# EAGLE board broken (EAGLE 8.6.0)
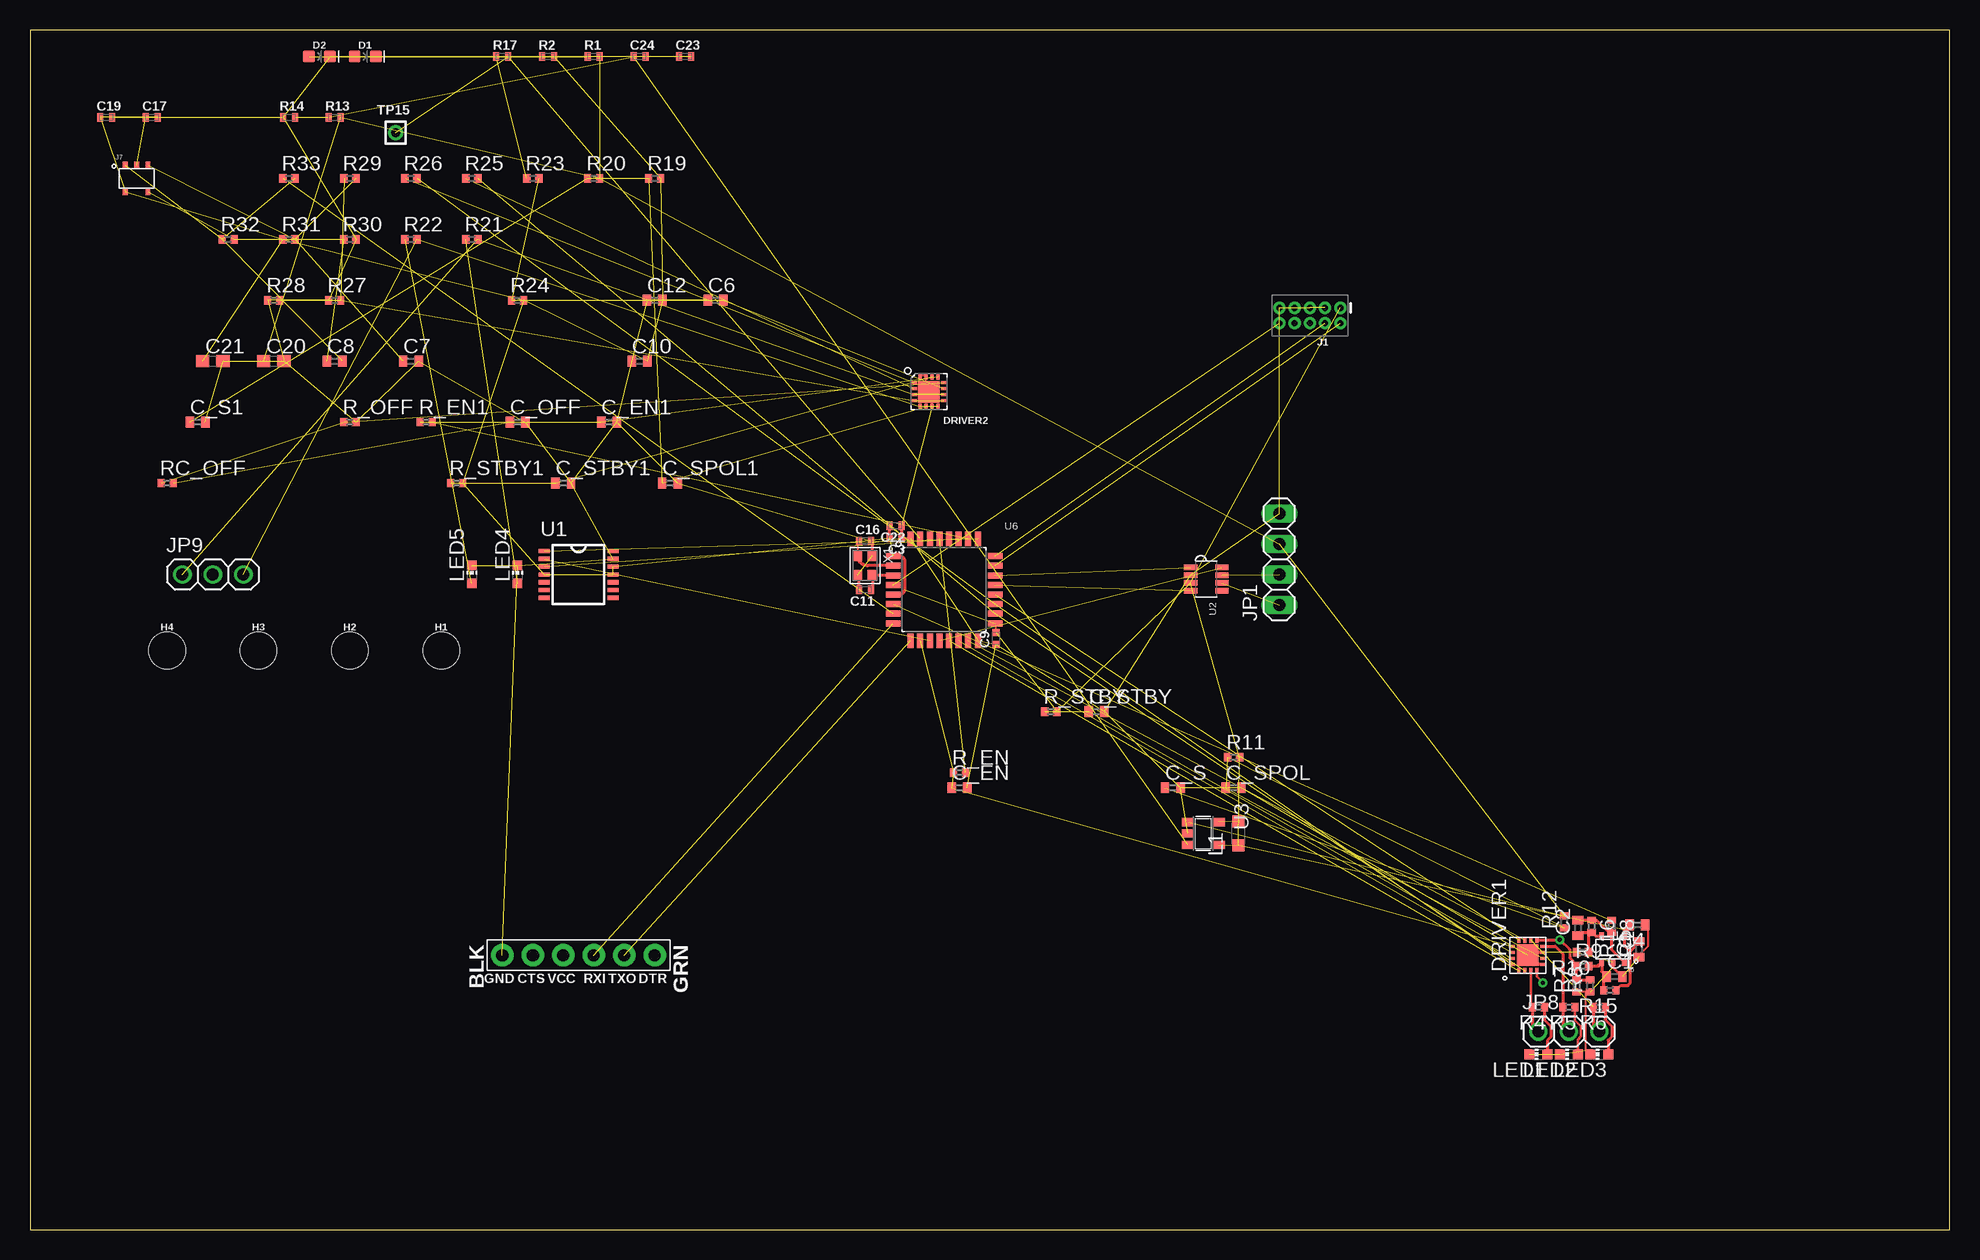
[diagram p0: board, top side]
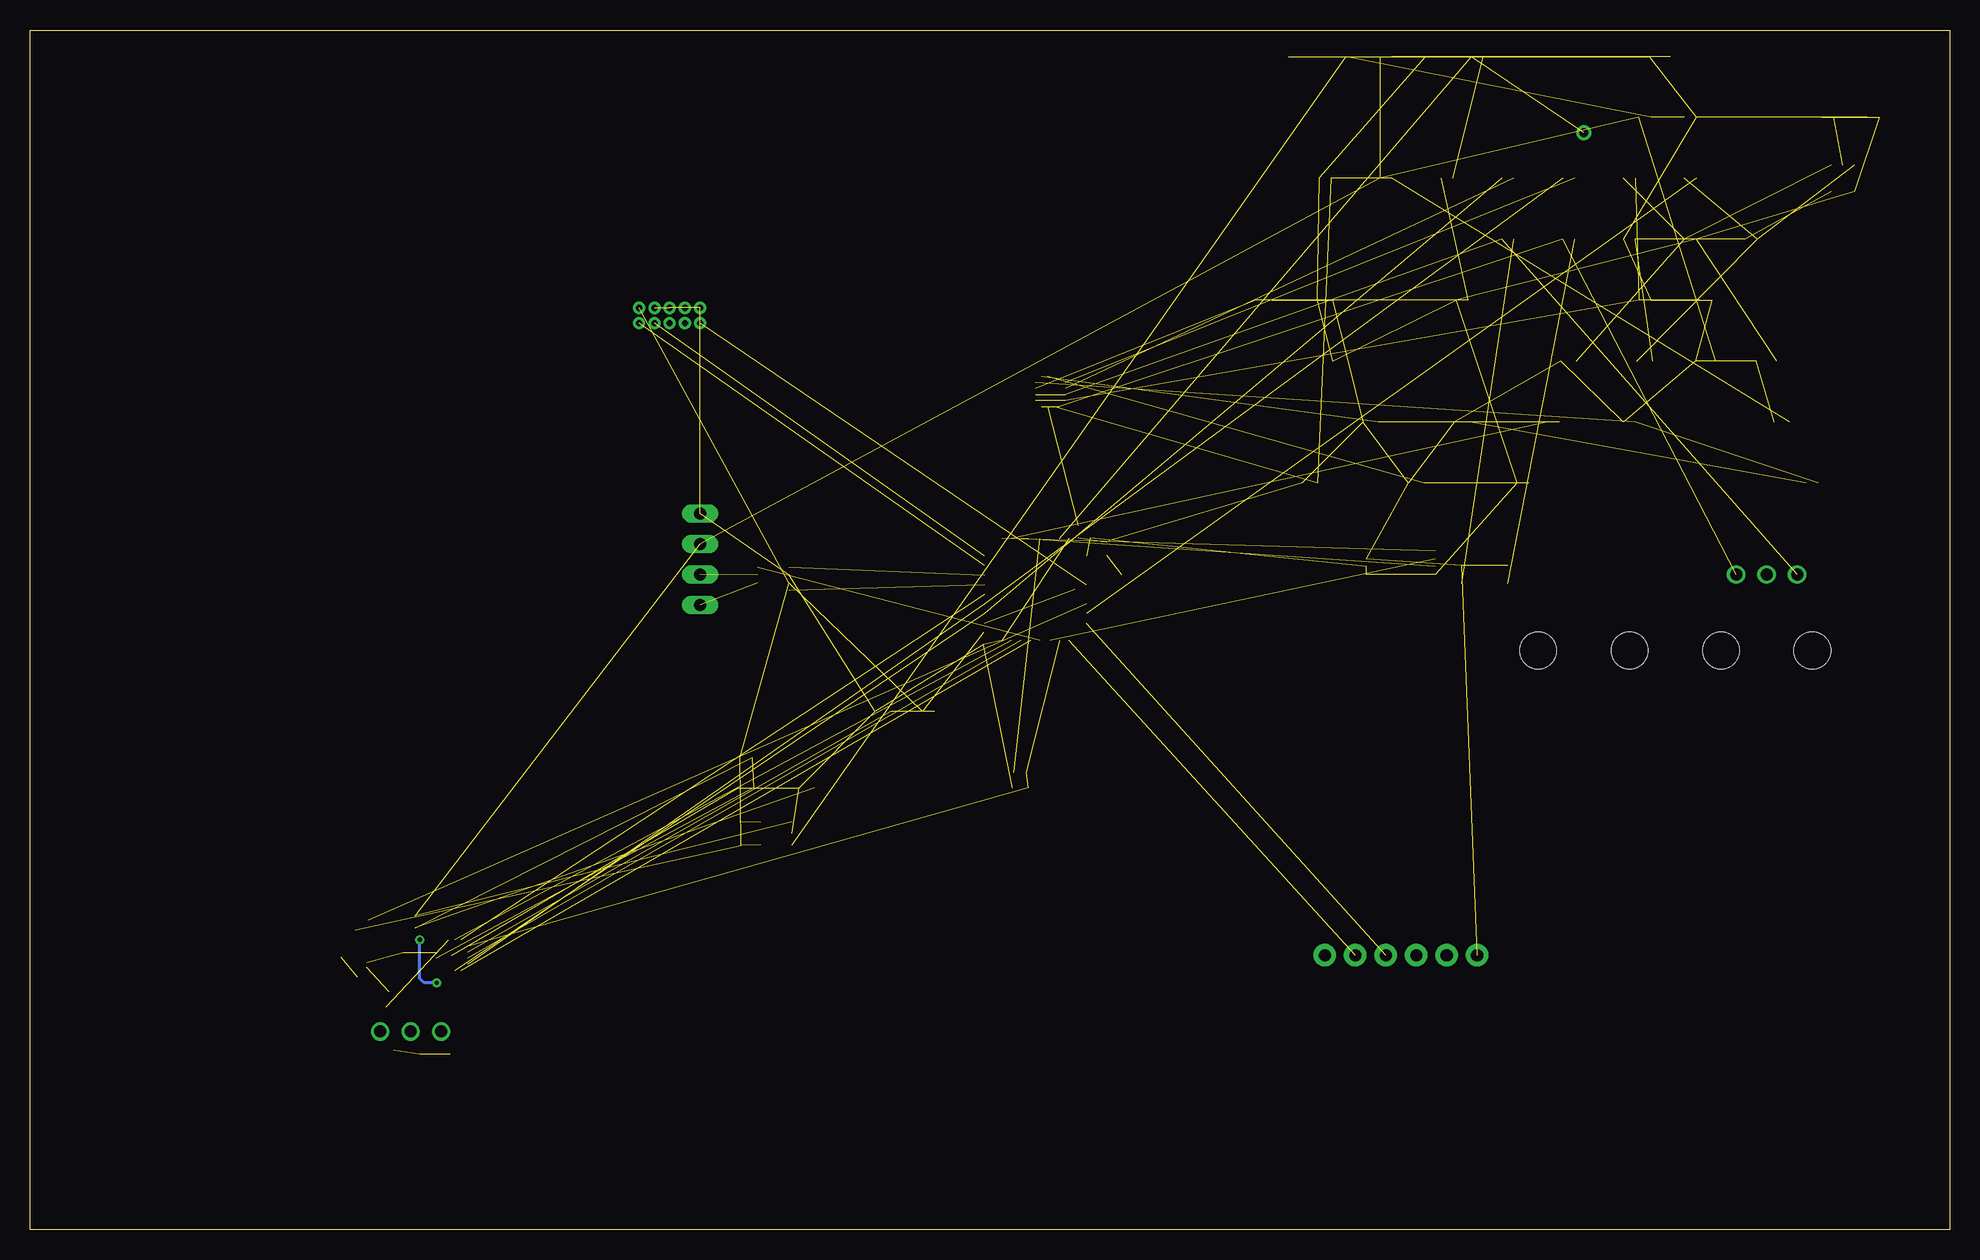
[diagram p1: board, bottom side, seen from below]

Size 160 x 100 mm. Coordinates in mm from the lower left corner, seen from the top.
Outline: 0,0 160,0 160,100 0,100 0,0
Copper layers (1*16): Top 0.035mm / dielectric 1.5mm / Bottom 0.035mm
Design rules "default": minimum track width 6mil, minimum drill 0.35mm, track to track 6mil, track to pad 6mil, pad to pad 6mil, via to via 6mil, smd to smd 6mil, copper to edge 40mil, drill to drill 6mil, minimum pad ring 10mil, minimum via ring 8mil, stop-mask expansion 4mil, vias tented up to drill 0mil, thermal gap 10mil

## Footprints (pad centres in the part's own frame; a part is rotated, then mirrored left to right if it is on the bottom)
C0402 = smd 0.7 x 0.9: 1 -0.65,0; 2 0.65,0
.0402-B-NOSILK = smd 0.6 x 0.7: 1 -0.5,0; 2 0.5,0
C0603 = smd 1.1 x 1: 1 -0.85,0; 2 0.85,0
LED-0603 = smd 1 x 1: A -0.877,0; C 0.877,0
STSPIN230 = smd 0.25 x 0.5: EN/FAULT 0.75,1.3; GND 0.25,-1.3; INVH -0.75,1.3; INVL -0.25,1.3; NC -0.75,-1.3; OUTV 0.75,-1.3; STBY/RESET 0.25,1.3; VS -0.25,-1.3 | smd 1.8 x 1.8: EPAD 0,0 | smd 0.5 x 0.25: INUH -1.3,0.25; INUL -1.3,0.75; INWH 1.3,0.75; INWL 1.3,0.25; OUTU -1.3,-0.25; OUTW 1.3,-0.25; SENSEU -1.3,-0.75; SENSEVW 1.3,-0.75
VFQFPN = smd 0.5 x 0.25: 1 -1.25,0.75; 2 -1.25,0.25; 3 -1.25,-0.25; 4 -1.25,-0.75; 9 1.25,-0.75; 10 1.25,-0.25; 11 1.25,0.25; 12 1.25,0.75 | smd 0.25 x 0.5: 5 -0.75,-1.25; 6 -0.25,-1.25; 7 0.25,-1.25; 8 0.75,-1.25; 13 0.75,1.25; 14 0.25,1.25; 15 -0.25,1.25; 16 -0.75,1.25 | smd 1.8 x 1.8: EPAD 0,0
STAND-OFF-TIGHT = hole 3.048: 0,0
2X5-PTH-1.27MM = drill 0.508 pad 1: 1 -2.54,-0.635; 2 -2.54,0.635; 3 -1.27,-0.635; 4 -1.27,0.635; 5 0,-0.635; 6 0,0.635; 7 1.27,-0.635; 8 1.27,0.635; 9 2.54,-0.635; 10 2.54,0.635
6_PIN_SERIAL_TARGET_SIDE_W_SILK = drill 1.016 pad 1.88: P$1 -6.35,0; P$2 -3.81,0; P$3 -1.27,0; P$4 1.27,0; P$5 3.81,0; P$6 6.35,0
SOT23-5 = smd 0.4 x 0.6: IN+ 0.95,1.1; IN- 0.95,-1.1; OUT -0.95,1.1; VCC+ -0.95,-1.1; VCC- 0,1.1
1X04 = drill 1.016 long: 1 -3.81,0; 2 -1.27,0; 3 1.27,0; 4 3.81,0
1X03 = drill 1.016: 1 -2.54,0; 2 0,0; 3 2.54,0
L2012C = smd 1 x 1: 1 -1,0; 2 1,0
CHIP-LED0603 = smd 0.8 x 0.8: A 0,-0.75; C 0,0.75
R0402 = smd 0.6 x 0.7: 1 -0.5,0; 2 0.5,0
2MM-TEST-POINT = drill 0.737: 1 0,0
TSSOP14 = smd 0.9 x 0.35: A -2.875,-1.95; B -2.875,-1.3; CLK -2.875,1.3; CSN -2.875,1.95; GND 2.875,1.3; I/PWM 2.875,1.95; MISO -2.875,0.65; MOSI -2.875,0; TEST -2.875,-0.65; U 2.875,-0.65; V 2.875,-1.3; VDD 2.875,0; VDD3V 2.875,0.65; W/PWM 2.875,-1.95
SOT23-8_TI-DCN = smd 0.45 x 1.1: 1 -0.975,-1.3; 2 -0.325,-1.3; 3 0.325,-1.3; 4 0.975,-1.3; 5 0.975,1.3; 6 0.325,1.3; 7 -0.325,1.3; 8 -0.975,1.3
SOT23-5' = smd 0.69 x 0.99: 1 -0.95,-1.29; 2 0,-1.29; 3 0.95,-1.29; 4 0.95,1.3; 5 -0.95,1.3
QFP32-7X7 = smd 1.2 x 0.5: 1 -4.25,2.8; 2 -4.25,2; 3 -4.25,1.2; 4 -4.25,0.4; 5 -4.25,-0.4; 6 -4.25,-1.2; 7 -4.25,-2; 8 -4.25,-2.8; 17 4.25,-2.8; 18 4.25,-2; 19 4.25,-1.2; 20 4.25,-0.4; 21 4.25,0.4; 22 4.25,1.2; 23 4.25,2; 24 4.25,2.8 | smd 0.5 x 1.2: 9 -2.8,-4.25; 10 -2,-4.25; 11 -1.2,-4.25; 12 -0.4,-4.25; 13 0.4,-4.25; 14 1.2,-4.25; 15 2,-4.25; 16 2.8,-4.25; 25 2.8,4.25; 26 2,4.25; 27 1.2,4.25; 28 0.4,4.25; 29 -0.4,4.25; 30 -1.2,4.25; 31 -2,4.25; 32 -2.8,4.25
CRYSTAL_2.5X2 = smd 0.9 x 0.8: 1 -0.825,-0.625; 2 0.825,-0.625; 3 0.825,0.625; 4 -0.825,0.625

## Placement (x,y rotation side)
C1  680P  [C0402]  132.08,21.08 0 top
C2  680P  [C0402]  129.03,25.15 90 top
C3  100n  [.0402-B-NOSILK]  72.14,57.66 180 top
C4  100n  [C0402]  133.99,25.4 180 top
C5  4.7u  [C0402]  134.11,23.37 90 top
C6  2.2n  [C0402]  57.15,77.47 0 top
C7  680P  [C0402]  31.75,72.39 0 top
C8  680P  [C0402]  25.4,72.39 0 top
C9  100n  [.0402-B-NOSILK]  80.52,49.28 90 top
C10  100n  [C0402]  50.8,72.39 0 top
C11  20p  [.0402-B-NOSILK]  69.6,53.34 180 top
C12  4.7u  [C0402]  52.07,77.47 0 top
C16  20p  [.0402-B-NOSILK]  69.6,57.4 0 top
C17  100n  [.0402-B-NOSILK]  10.16,92.71 0 top
C19  100n  [.0402-B-NOSILK]  6.35,92.71 0 top
C20  4.7u  [C0603]  20.32,72.39 0 top
C21  4.7u  [C0603]  15.24,72.39 0 top
C22  100n  [.0402-B-NOSILK]  72.14,58.67 180 top
C23  100n  [.0402-B-NOSILK]  54.61,97.79 0 top
C24  100n  [.0402-B-NOSILK]  50.8,97.79 0 top
C_EN  10n  [C0402]  77.47,36.83 0 top
C_EN1  10n  [C0402]  48.26,67.31 0 top
C_OFF  22n  [C0402]  40.64,67.31 0 top
C_S  2.2u  [C0402]  95.25,36.83 0 top
C_S1  2.2u  [C0402]  13.97,67.31 0 top
C_SPOL  22u  [C0402]  100.33,36.83 0 top
C_SPOL1  22u  [C0402]  53.34,62.23 0 top
C_STBY  1n  [C0402]  88.9,43.18 0 top
C_STBY1  1n  [C0402]  44.45,62.23 0 top
D1  GREEN  [LED-0603]  27.94,97.79 0 top
D2  GREEN  [LED-0603]  24.13,97.79 0 top
DRIVER1  STSPIN230  [STSPIN230]  124.84,22.86 90 top
DRIVER2  STSPIN250  [VFQFPN]  74.93,69.85 0 top
H1  STAND-OFFTIGHT  [STAND-OFF-TIGHT]  34.29,48.26 0 top
H2  STAND-OFFTIGHT  [STAND-OFF-TIGHT]  26.67,48.26 0 top
H3  STAND-OFFTIGHT  [STAND-OFF-TIGHT]  19.05,48.26 0 top
H4  STAND-OFFTIGHT  [STAND-OFF-TIGHT]  11.43,48.26 0 top
J1  CORTEX_DEBUG_PTH  [2X5-PTH-1.27MM]  106.68,76.2 180 top
J5  [6_PIN_SERIAL_TARGET_SIDE_W_SILK]  45.72,22.86 180 top
J6  TSV991ILT  [SOT23-5]  131.95,23.37 180 top
J7  TSV991ILT  [SOT23-5]  8.89,87.63 0 top
JP1  [1X04]  104.14,55.88 90 top
JP8  [1X03]  128.27,16.51 0 top
JP9  [1X03]  15.24,54.61 0 top
L1  10u  [L2012C]  100.71,33.02 90 top
LED1  [CHIP-LED0603]  125.73,14.61 90 top
LED2  [CHIP-LED0603]  128.27,14.61 90 top
LED3  [CHIP-LED0603]  130.81,14.61 90 top
LED4  [CHIP-LED0603]  40.64,54.61 0 top
LED5  [CHIP-LED0603]  36.83,54.61 0 top
R1  2.7k  [.0402-B-NOSILK]  46.99,97.79 0 top
R2  2.7k  [.0402-B-NOSILK]  43.18,97.79 0 top
R4  2.2k  [R0402]  125.73,18.54 180 top
R5  2.2k  [R0402]  128.27,18.54 180 top
R6  2.2k  [R0402]  130.81,18.54 180 top
R7  0.68  [R0402]  128.91,20.32 90 top
R8  0.68  [R0402]  130.05,20.32 90 top
R9  680  [R0402]  129.41,21.97 0 top
R10  2.2k  [R0402]  129.41,23.11 180 top
R11  NP  [R0402]  100.33,39.37 0 top
R12  0  [R0402]  127.89,25.65 90 top
R13  665k  [.0402-B-NOSILK]  25.4,92.71 0 top
R14  332k  [.0402-B-NOSILK]  21.59,92.71 0 top
R15  2.2k  [R0402]  131.7,19.94 180 top
R16  2.2k  [R0402]  130.18,25.27 270 top
R17  10k  [.0402-B-NOSILK]  39.37,97.79 0 top
R18  0  [R0402]  131.83,25.27 270 top
R19  NP  [R0402]  52.07,87.63 0 top
R20  0  [R0402]  46.99,87.63 0 top
R21  2.2k  [R0402]  36.83,82.55 0 top
R22  2.2k  [R0402]  31.75,82.55 0 top
R23  18k  [R0402]  41.91,87.63 0 top
R24  100k  [R0402]  40.64,77.47 0 top
R25  330  [R0402]  36.83,87.63 0 top
R26  330  [R0402]  31.75,87.63 0 top
R27  0.68  [R0402]  25.4,77.47 0 top
R28  0.68  [R0402]  20.32,77.47 0 top
R29  680  [R0402]  26.67,87.63 0 top
R30  2.2k  [R0402]  26.67,82.55 0 top
R31  2.2k  [R0402]  21.59,82.55 0 top
R32  2.2k  [R0402]  16.51,82.55 0 top
R33  0  [R0402]  21.59,87.63 0 top
R_EN  18k  [R0402]  77.47,38.1 0 top
R_EN1  18k  [R0402]  33.02,67.31 0 top
R_OFF  47k  [R0402]  26.67,67.31 0 top
R_STBY  18k  [R0402]  85.09,43.18 0 top
R_STBY1  18k  [R0402]  35.56,62.23 0 top
RC_OFF  1k  [R0402]  11.43,62.23 0 top
TP15  TEST-POINT  [2MM-TEST-POINT]  30.48,91.44 0 top
U1  AS5047P  [TSSOP14]  45.72,54.61 0 top
U2  TCAN330  [SOT23-8_TI-DCN]  98.04,54.23 270 top
U3  LM3671MF-3.3  [SOT23-5']  97.79,33.02 270 top
U6  STM32F042K6  [QFP32-7X7]  76.2,53.34 0 top
X1  16MHZ-2.5x2mm  [CRYSTAL_2.5X2]  69.6,55.37 270 top

## Library data of the parts
C1 C2 C4-C8 C10 C12 C_EN C_EN1 C_OFF C_S C_S1 C_SPOL C_SPOL1 C_STBY C_STBY1 = rcl; SPICEPREFIX: C
C3 C9 C17 C19 C22-C24 = rcl_custom; DIS: Digi-Key; DPN: 1276-1001-1-ND; MFR: Samsung; MPN: CL05B104KO5NNNC
C11 C16 = rcl_custom; DIS: Digi-Key; DPN: 1276-6601-1-ND; MFR: Samsung; MPN: CL05C200JB51PNC
C20 C21 = rcl; DIS: Digi-Key; DPN: 1276-1001-1-ND; MFR: Samsung; MPN: CL05B104KO5NNNC
D1 D2 = SparkFun-LED; PROD_ID: DIO-00821
DRIVER1 = STSPIN230
DRIVER2 = U-ST-STSPIN250-Brushed-DC-controller
H1-H4 = SparkFun-Hardware
J1 J5 = SparkFun-Connectors
J6 J7 = TSV991ILT
JP1 = pinhead
JP8 JP9 LED1-LED5 = adafruit
L1 = rcl; DIS: Digi-Key; DPN: 587-2452-1-ND; MFR: Taiyo Yuden; MPN: CB2012T100KR
R1 R2 R13 R17 = rcl_custom; DIS: Digi-Key; DPN: 1276-4275-1-ND; MFR: Samsung; MPN: RC1005F6653CS
R4-R12 R15 R16 R18-R33 R_EN R_EN1 R_OFF R_STBY R_STBY1 RC_OFF = rcl; SPICEPREFIX: R
R14 = rcl_custom; DIS: Digi-Key; DPN: 1276-4245-1-ND; MFR: Samsung; MPN: RC1005F3323CS
TP15 = Tova
U1 = AS5047P
U2 = TCAN330; DIS: Digi-Key; DPN: 296-44211-1-ND; MFR: Texas Instruments; MPN: TCAN330GDCNT
U3 = LM3761; DIS: Digi-Key; DPN: LM3671MF-3.3/NOPBCT-ND; MFR: TI; MPN: LM3671MF-3.3/NOPB
U6 = STM32F042K; DIS: Digi-Key; DPN: STM32F042K6T7-ND; MFR: STMicroelectronics; MPN: STM32F042K6T7
X1 = low-gain-radio; DIS: Digi-Key; DPN: XC2181CT-ND; MFR: ECS Inc.; MPN: ECS-160-10-36Q-ES-TR

## Nets
3.3V: C3.2 C4.2 C5.2 C9.2 C10.2 C12.2 C17.2 C19.1 C21.1 C22.2 J1.1 J6.VCC+ J7.VCC+ L1.1 R2.2 R11.2 R15.1 R19.2 R24.2 R31.1 R_STBY1.2 R_STBY.2 U1.MOSI U1.VDD U1.VDD3V U2.3 U3.4 U6.1 U6.5 U6.17
BOOT: R17.2 TP15.1 U6.31
CAN_L_PH: JP1.1 U2.6
CAN_RX: U2.4 U6.21
CAN_SHDN: U2.5
CAN_TX: U2.1 U6.22
CANH_PH: JP1.2 U2.7
CRYSTALIN: C16.1 U6.2 X1.1
CRYSTALOUT: C11.1 U6.3 X1.3
FAULT_MAG: C_EN1.1 DRIVER2.13 R_EN1.1
GND: C1.2 C3.1 C4.1 C5.1 C6.1 C7.2 C9.1 C10.1 C11.2 C12.1 C16.2 C17.1 C19.2 C20.2 C21.2 C22.1 C23.2 C24.2 C_EN1.2 C_EN.2 C_OFF.2 C_S1.2 C_S.2 C_SPOL1.2 C_SPOL.2 C_STBY1.2 C_STBY.2 D1.C D2.C DRIVER1.EPAD DRIVER1.GND DRIVER1.NC DRIVER2.7 DRIVER2.15 DRIVER2.16 DRIVER2.EPAD J1.3 J1.5 J1.7 J1.9 J5.P$6 J6.VCC- J7.VCC- JP1.4 LED1.C LED2.C LED3.C LED4.C LED5.C R7.1 R8.1 R10.2 R14.1 R17.1 R23.1 R27.1 R28.1 R30.2 R_OFF.2 U1.GND U2.2 U3.2 U6.16 U6.32 X1.2 X1.4
N$3: DRIVER2.2 R25.1
N$4: DRIVER2.4 DRIVER2.9 R27.2 R28.2 R29.1
N$5: DRIVER2.1 R26.1
N$6: LED1.A R4.1
N$7: DRIVER1.OUTU JP8.1 R4.2
N$8: DRIVER1.OUTV JP8.2 R5.2
N$10: LED2.A R5.1
N$11: LED3.A R6.1
N$12: C_S.1 C_SPOL.1 DRIVER1.VS R11.1 R12.1
N$13: DRIVER1.SENSEU DRIVER1.SENSEVW R7.2 R8.2 R9.1
N$14: C2.1 J6.IN- R10.1 R16.2
N$15: C7.1 J7.IN+ R29.2 R31.2
N$16: C1.1 J6.IN+ R9.2 R15.2
N$17: C8.1 J7.IN- R30.1 R32.2
N$18: C_OFF.1 RC_OFF.2
N$19: DRIVER2.12 R_OFF.1 RC_OFF.1
N$20: C_S1.1 C_SPOL1.1 DRIVER2.6 R19.1 R20.1
N$21: DRIVER1.OUTW JP8.3 R6.2
N$22: LED4.A R21.1
N$23: LED5.A R22.1
N$24: DRIVER2.3 DRIVER2.10 JP9.1 R21.2
N$25: C6.2 DRIVER2.11 R23.2 R24.1
N$26: DRIVER2.5 DRIVER2.8 JP9.3 R22.2
N$27: C8.2 J7.OUT R32.1 R33.2
N$29: C2.2 J6.OUT R16.1 R18.2
N$270: D1.A R1.1
N$271: D2.A R2.1
NRESET: J1.10 U6.4
PA0/CURR_FDB_BLDC: R18.1 U6.6
PA1/CURR_FDB_MAG: R33.1 U6.7
PA2/USART2_TX: J5.P$3 U6.8
PA3/USART2_RX: J5.P$2 U6.9
PA4/FAULT: C_EN.1 DRIVER1.EN/FAULT R_EN.1 U6.10
PA5/SPI1_SCK: U1.CLK U6.11
PA6/CAN_LSTN: U2.8 U6.12
PA7/INUL: DRIVER1.INUL U6.13
PA8/INUH/PWM_MAG: DRIVER1.INUH R25.2 U6.18
PA9/INVH/PH_MAG: DRIVER1.INVH R26.2 U6.19
PA10/INWH: DRIVER1.INWH U6.20
PA15/SPI1_NSS: U1.CSN U6.25
PB0/INVL: DRIVER1.INVL U6.14
PB1/INWL: DRIVER1.INWL U6.15
PB3/EN_MAG: R_EN1.2 U6.26
PB4/SPI1_MISO: U1.MISO U6.27
PB5: U6.28
PB6/EN_BLDC: R_EN.2 U6.29
PB7: U6.30
STBY/RESET_BLDC: C_STBY.1 DRIVER1.STBY/RESET R_STBY.1
STBY/RESET_MAG: C_STBY1.1 DRIVER2.14 R_STBY1.1
STEPD: L1.2 U3.5
SWCLK: J1.4 U6.24
SWDIO: J1.2 U6.23
V_BATT: C20.1 C23.1 JP1.3 R1.2 R12.2 R13.2 R20.2 U3.1
VDIV: C24.1 R13.1 R14.2 U3.3

## Tracks (layer width: path | path; a pad name or v marks a point on that pad's centre or on a via)
3.3V  (23 unrouted)
  Top 0.152: C9.2 80.47,49.84 80.47,50.44 U6.17
  Top 0.254: R15.1 132.61,20.35 133.2,20.35 133.38,20.54 133.38,23.18 | C5.2 134.11,23.91 133.38,23.18 | 133.38,23.18 132.9,23.66 J6.VCC+ 132.9,24.97 C4.2 | C3.2 C22.2 | U6.1 72.51,56.14 arc-90 72.9,55.75 72.9,53.34 arc-90 72.52,52.96 71.97,52.96 arc90 U6.5
BOOT  (2 unrouted)
CAN_L_PH  (1 unrouted)
CAN_RX  (1 unrouted)
CAN_TX  (1 unrouted)
CANH_PH  (1 unrouted)
CRYSTALIN
  Top 0.152: C16.1 69.04,57.3 69.04,56.24 X1.1
  Top 0.254: U6.2 69.83,55.34 arc-90 X1.1
CRYSTALOUT
  Top 0.254: U6.3 X1.3 arc-90 X1.3 70.22,53.47 arc-90 C11.1
FAULT_MAG  (2 unrouted)
GND  (52 unrouted)
  Top 0.152: C5.1 134.11,22.86 134.87,23.62 134.87,25.15 134.72,25.3 C4.1 | 129.69,19.81 130,19.81 R8.1 | 129.69,19.81 128.93,19.81 R7.1 | 129.69,19.81 129.69,14.94 130,14.63 LED3.C | DRIVER2.16 74.22,71.17 74.68,71.17 DRIVER2.15 74.68,71.02 74.68,70.1 DRIVER2.EPAD 75.13,69.65 75.13,68.73 DRIVER2.7
  Top 0.203: 125.59,22.11 arc-90 DRIVER1.EPAD arc-90 125.09,23.11
  Top 0.254: J6.VCC- 131.95,21.86 C1.2 | DRIVER1.GND 125.09,23.11 | DRIVER1.NC 125.59,22.11 | C11.2 69.1,54.42 arc90 X1.2 | X1.4 70.22,57.28 arc90 C16.2 | C22.1 C3.1 72.64,57.59 U6.32
N$3  (1 unrouted)
N$4  (4 unrouted)
N$5  (1 unrouted)
N$6
  Top 0.254: R4.1 126.23,17.48 126.77,16.94 126.77,16.08 126.48,15.79 LED1.A
N$7
  Top 0.203: DRIVER1.OUTU 125.09,18.68 R4.2
  Top 0.254: R4.2 125.23,17.01 JP8.1
N$8
  Top 0.254: JP8.2 127.77,17.01 R5.2 127.76,22.99 127.25,23.5 127.24,23.5 127.13,23.61 DRIVER1.OUTV
N$10
  Top 0.203: R5.1 128.77,17.45 129.29,16.93 129.29,16.09 129.02,15.82 LED2.A
N$11
  Top 0.254: R6.1 131.31,17.48 131.85,16.94 131.85,16.08 131.56,15.79 LED3.A
N$12  (4 unrouted)
N$13  (via drill 0.35)
  Top 0.152: R7.2
  Top 0.203: DRIVER1.SENSEU 125.59,21.09 v126.11,20.57
  Top 0.254: R8.2 R7.2 R9.1 | R9.1 arc90 128.76,22.13 arc-90 R9.1 | DRIVER1.SENSEVW v127.51,24.16 128.33,23.33 128.33,22.65 128.91,22.07 R9.1
  Bottom 0.254: v126.11,20.57 127.13,20.57 127.51,20.95 v127.51,24.16
N$14
  Top 0.254: C2.1 129.31,24.77 R16.2 | R16.2 130.48,24.47 J6.IN- | R16.2 129.91,24.51 R10.1
N$15  (3 unrouted)
N$16
  Top 0.254: R9.2 130.71,21.97 | 130.71,21.97 J6.IN+ 131,21.51 C1.1 131.2,20.85 R15.2 | 130.71,21.97 130.79,21.97
N$17  (3 unrouted)
N$18  (1 unrouted)
N$19  (2 unrouted)
N$20  (4 unrouted)
N$21  (1 unrouted)
  Top 0.254: R6.2 130.31,17.01 JP8.3
N$22  (1 unrouted)
N$23  (1 unrouted)
N$24  (3 unrouted)
N$25  (3 unrouted)
N$26  (3 unrouted)
N$27  (3 unrouted)
N$29
  Top 0.254: C2.2 130.15,25.8 R16.1 130.59,25.77 131.59,24.77 R18.2 131.83,23.34 J6.OUT
N$270  (1 unrouted)
N$271  (1 unrouted)
NRESET  (1 unrouted)
PA0/CURR_FDB_BLDC  (1 unrouted)
PA1/CURR_FDB_MAG  (1 unrouted)
PA2/USART2_TX  (1 unrouted)
PA3/USART2_RX  (1 unrouted)
PA4/FAULT  (3 unrouted)
PA5/SPI1_SCK  (1 unrouted)
PA6/CAN_LSTN  (1 unrouted)
PA7/INUL  (1 unrouted)
PA8/INUH/PWM_MAG  (2 unrouted)
PA9/INVH/PH_MAG  (2 unrouted)
PA10/INWH  (1 unrouted)
PA15/SPI1_NSS  (1 unrouted)
PB0/INVL  (1 unrouted)
PB1/INWL  (1 unrouted)
PB3/EN_MAG  (1 unrouted)
PB4/SPI1_MISO  (1 unrouted)
PB6/EN_BLDC  (1 unrouted)
STBY/RESET_BLDC  (2 unrouted)
STBY/RESET_MAG  (2 unrouted)
STEPD  (1 unrouted)
SWCLK  (1 unrouted)
SWDIO  (1 unrouted)
V_BATT  (7 unrouted)
VDIV  (3 unrouted)